# Altium PCB EE318.PcbDoc
Units mm, origin at the board's own origin, x right, y up, seen from the top; angles counter-clockwise.
Board outline 71.4 x 70 mm, 2 copper layers (Top Layer, Bottom Layer); 33 components, 36 nets, 108 pads, 17 vias.
Unrouted connection lines stored in the file: 1.
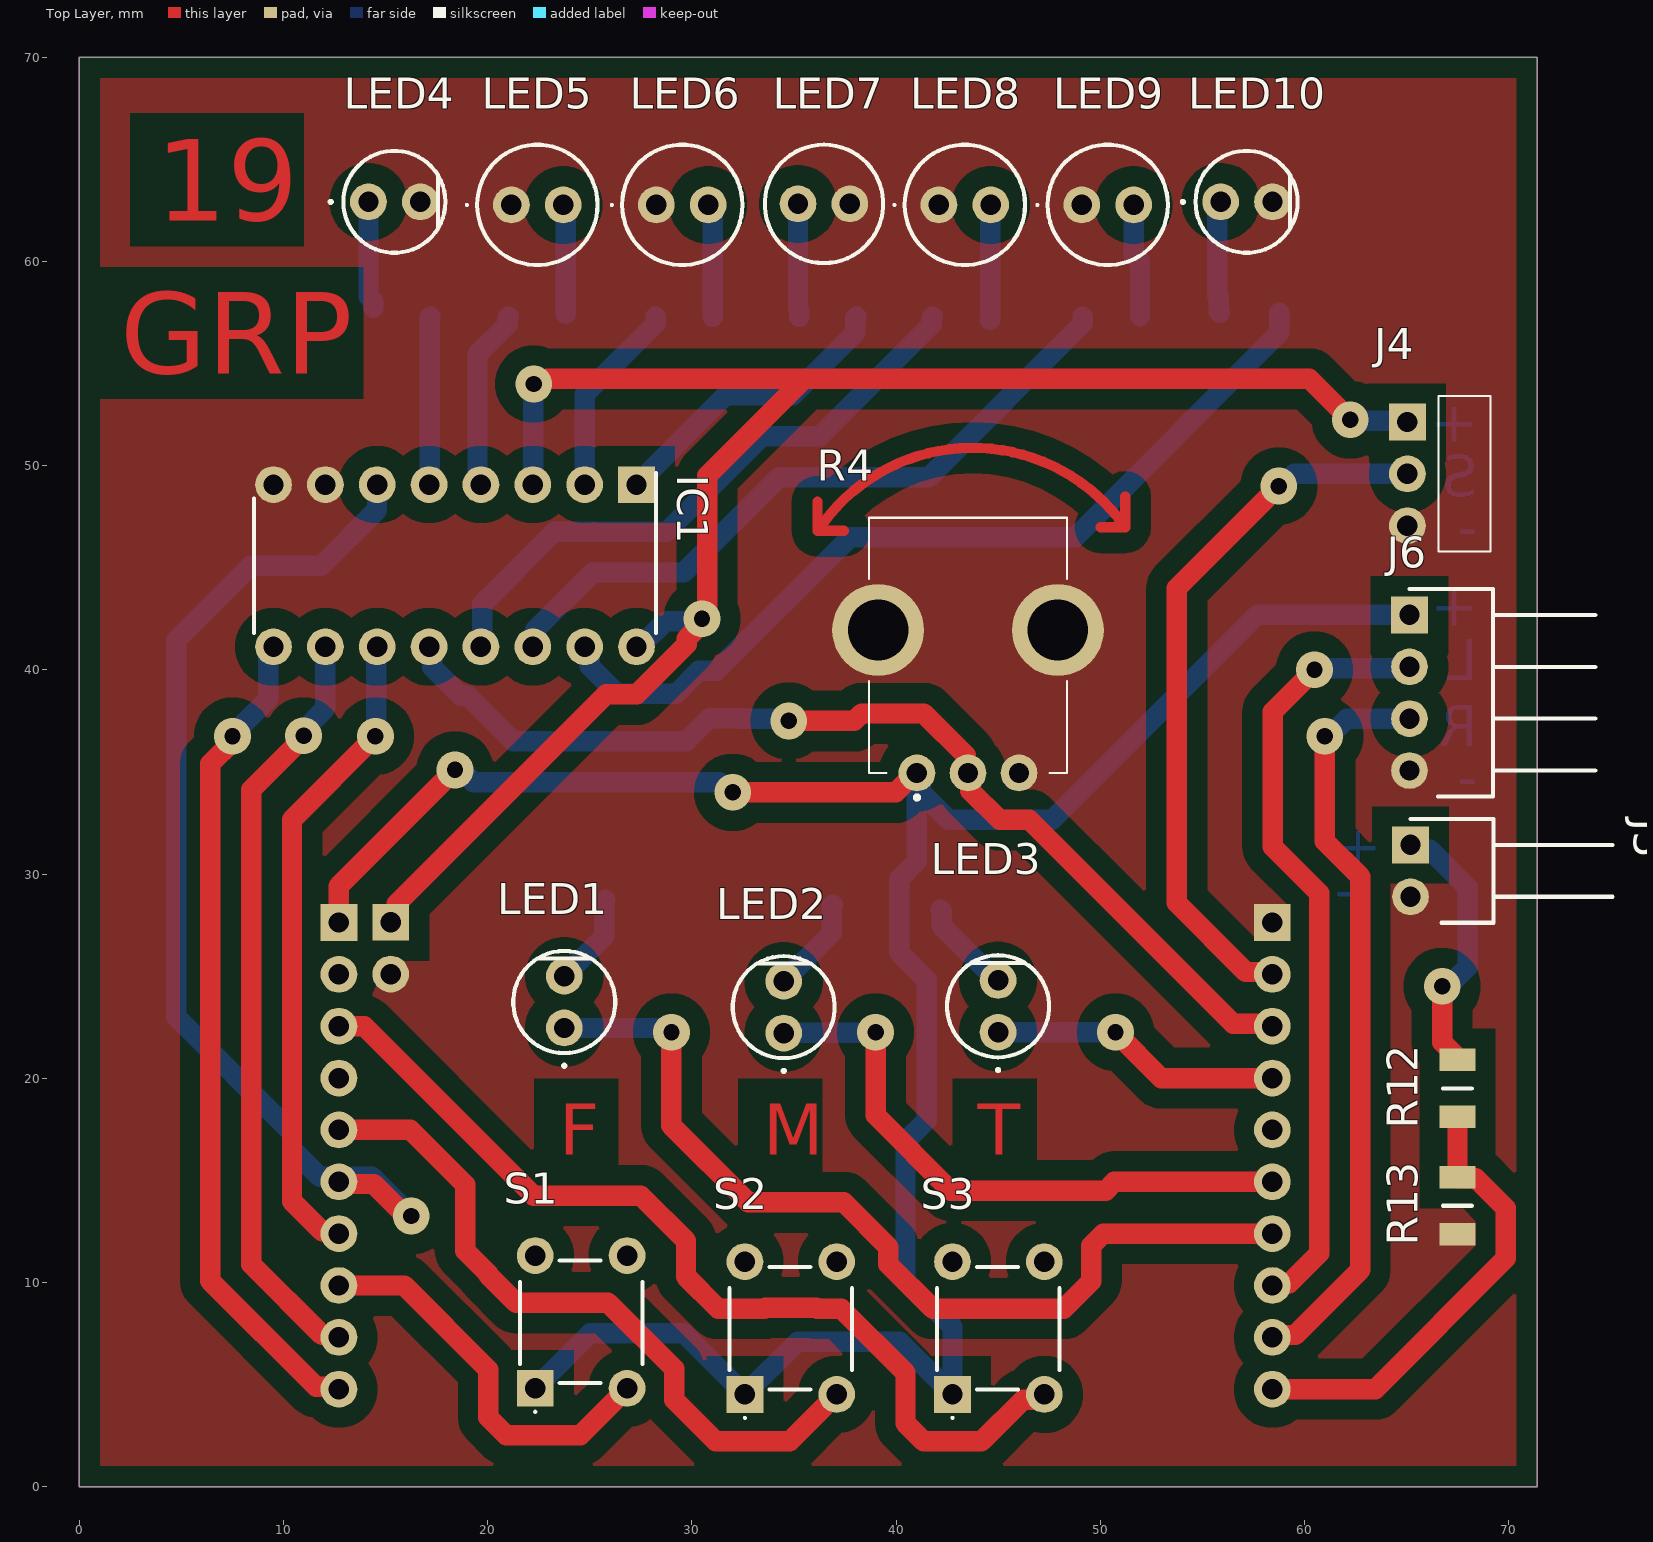
[diagram p0: Top Layer view]
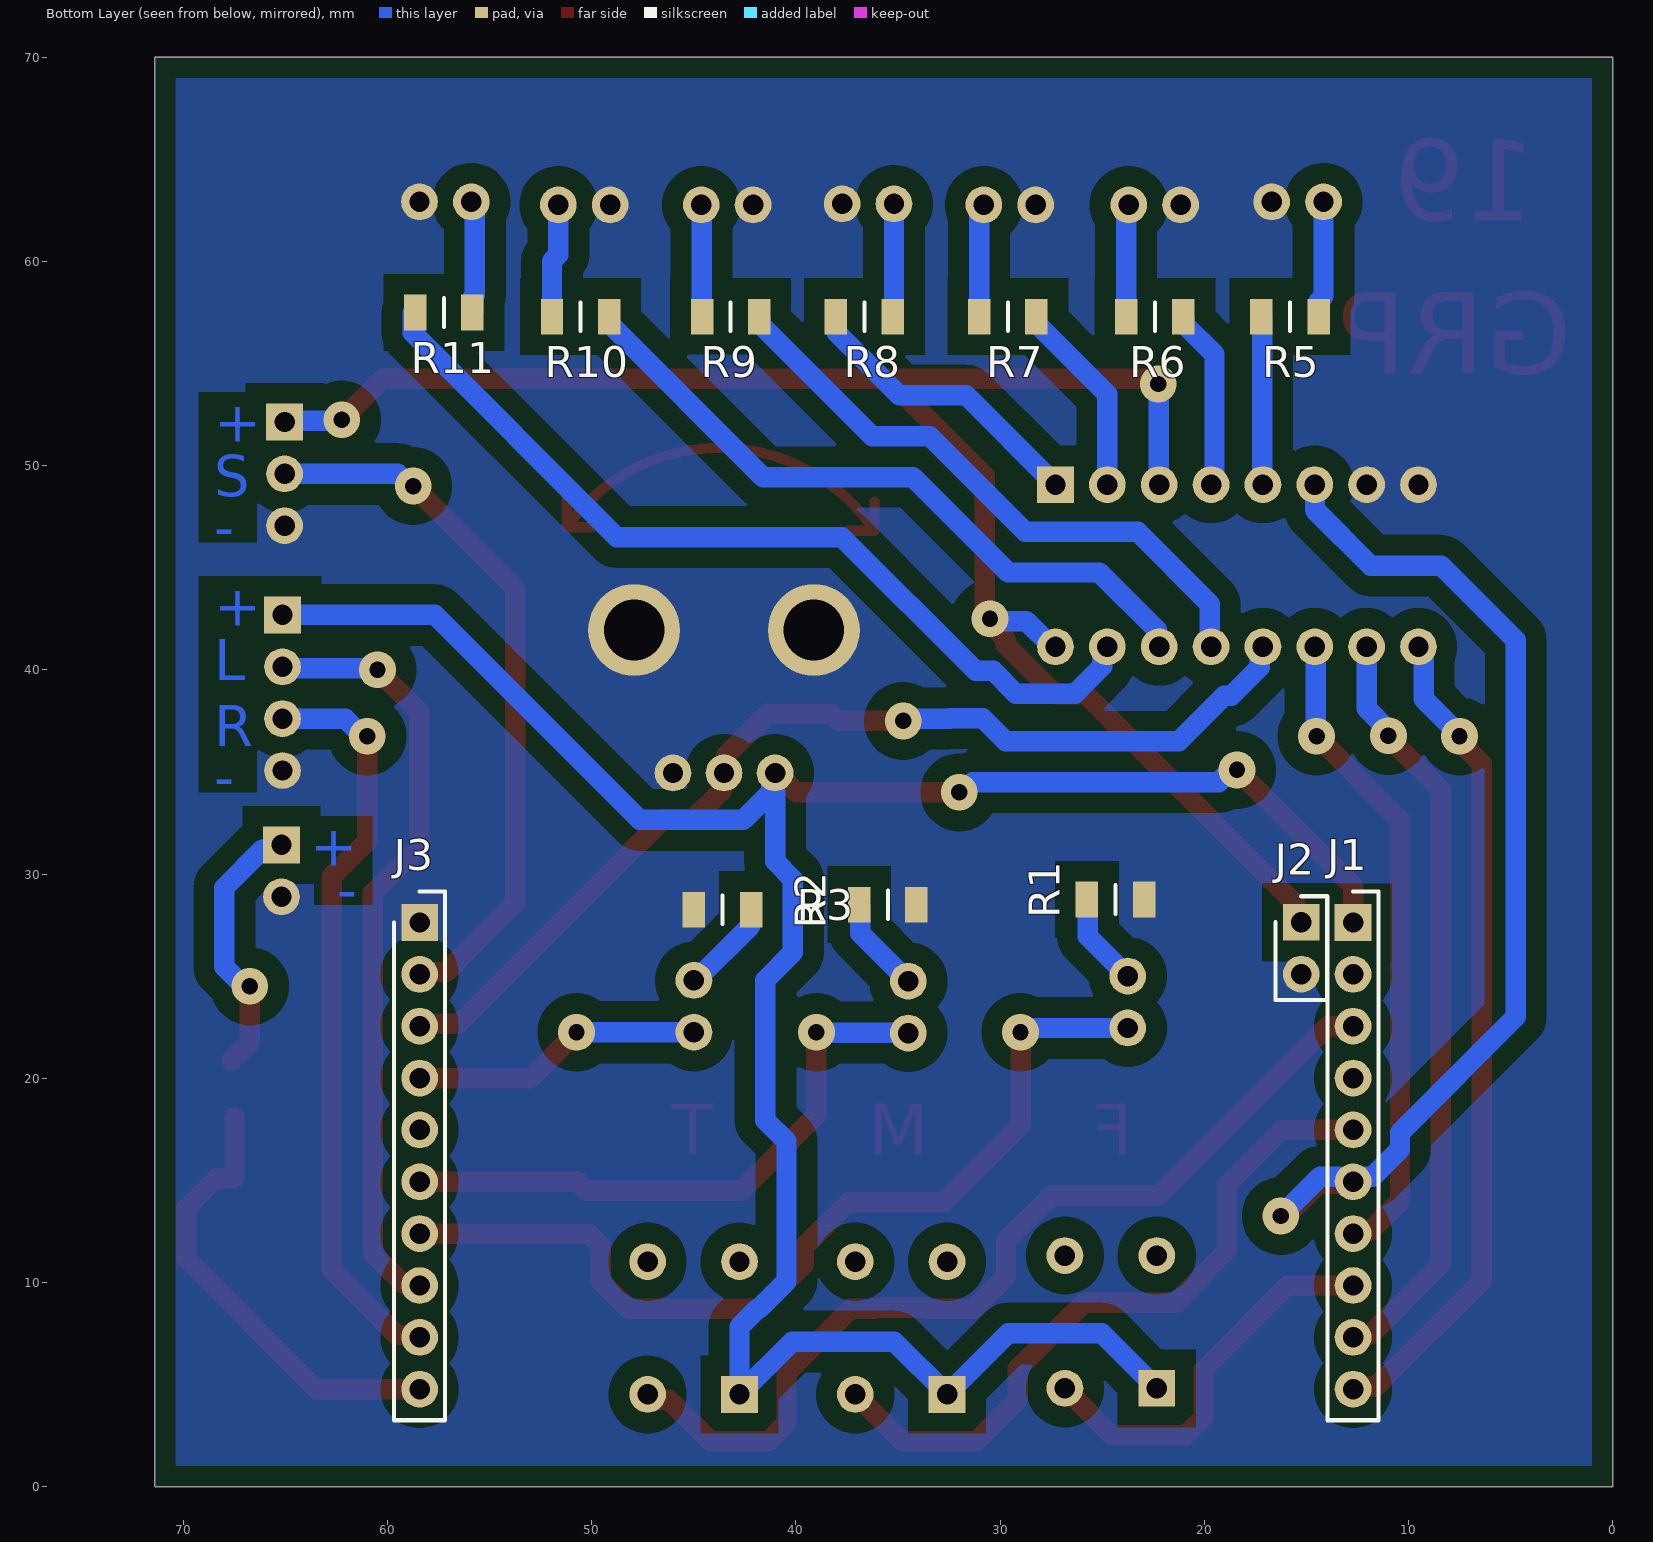
[diagram p1: Bottom Layer view, seen from below]
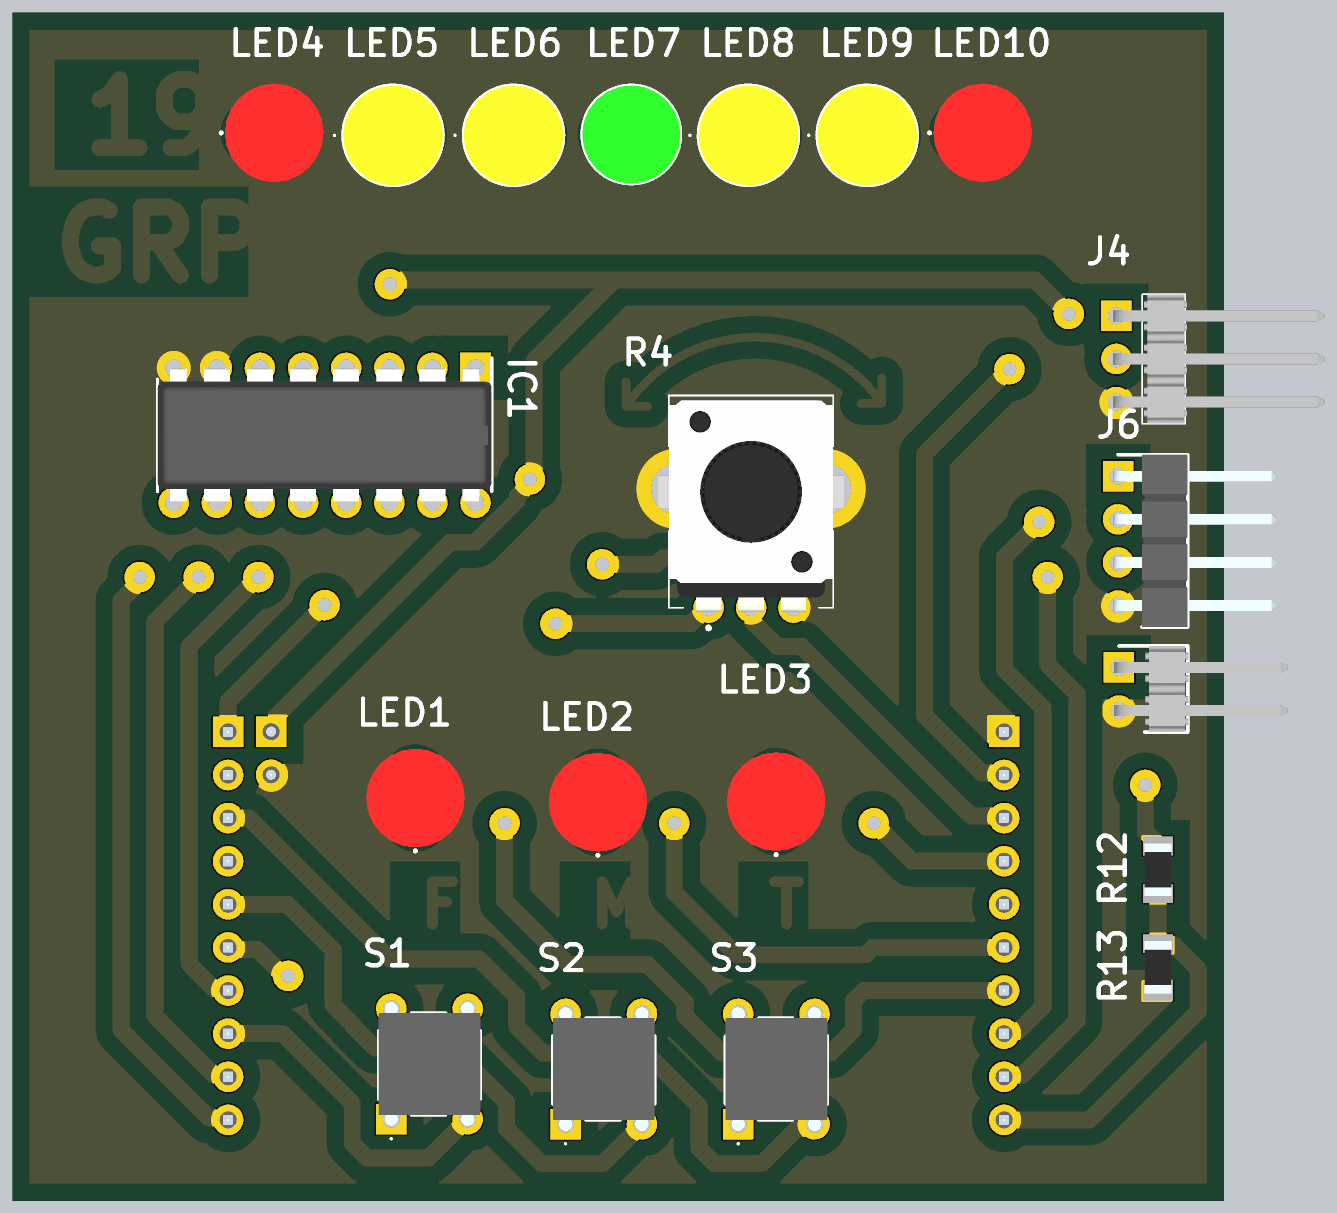
[diagram p2: 3D render of the assembled board from above, using the file's embedded part models]
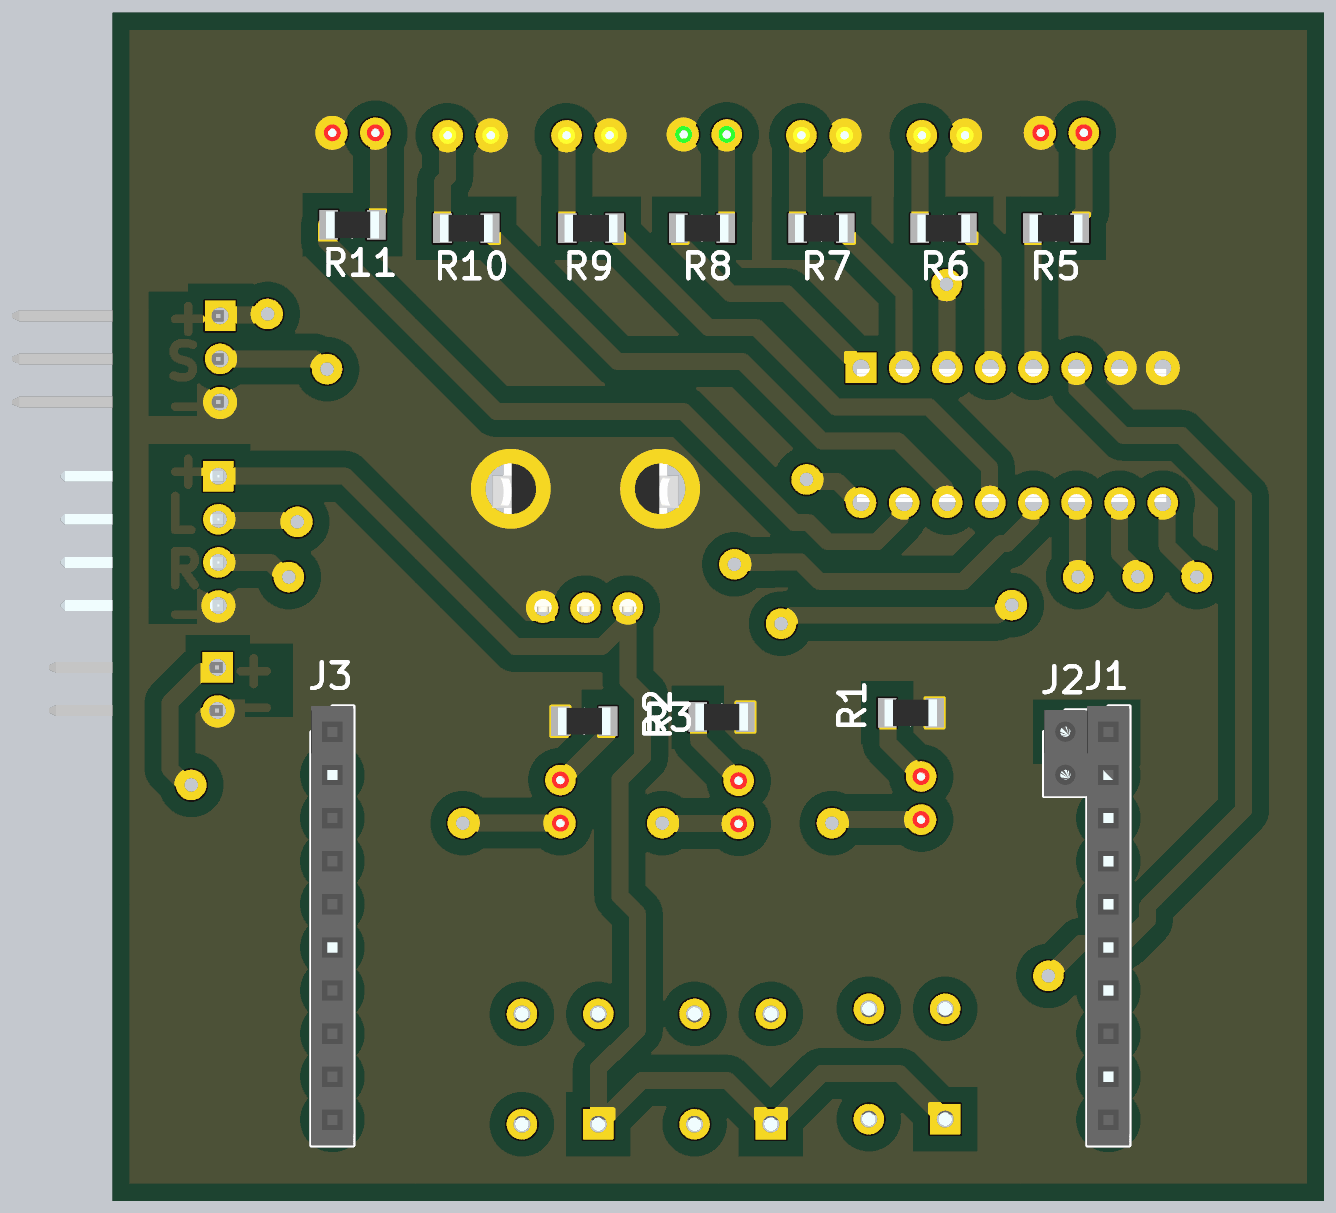
[diagram p3: 3D render of the assembled board from below, using the file's embedded part models]

## Layer stack, top to bottom
Top Solder: solder mask 0.0102, Solder Resist, Dk 3.5
Top Layer: signal copper 0.0356
Dielectric 1: dielectric 0.32, FR-4, Dk 4.8
Bottom Layer: signal copper 0.0356
Bottom Solder: solder mask 0.0102, Solder Resist, Dk 3.5

## Board outline
0,0 71.4,0 71.4,70 0,70

## Design rules (kind name [scope] priority, off if disabled: settings)
Clearance Clearance_1 [All] p1: gap=1 ignorepadtopadclearanceinfootprint=FALSE except(0: Arc-Hole Track-Hole SMDPad-Hole THPad-Hole Via-Hole Fill-Hole Poly-Hole Region-Hole Text-Hole; 0.254: Arc-Text Track-Text SMDPad-Text THPad-Text Via-Text Fill-Text Poly-Text Region-Text Text-Text; 0.8: THPad-THPad)
HoleSize [All] p1: absolutevalues=TRUE maxlimit=2.54 minlimit=0.8 maxpercent=80.000 minpercent=20.000
PlaneConnect [All] p1: planeconnectstyle=Direct reliefexpansion=0.508 reliefentries=4 reliefconductorwidth=0.254 reliefairgap=0.254
PolygonConnect [All] p1: connectstyle=Direct reliefconductorwidth=0.254 reliefentries=4 polygonreliefangle="90 Angle" airgapwidth=0.254
RoomDefinition EE318 [InComponentClass('EE318')] p1: confinementstyle=ConfineIn formatcopy=TRUE lockcomponents=FALSE outline -19.6,-25.4 31.2,-25.4 31.2,0 -19.6,0
RoutingVias [All] p1: holewidth=0.8 width=1.6 viastyle="Through Hole" minholewidth=0.8 minwidth=1.6 maxholewidth=0.8 maxwidth=2
SolderMaskExpansion [All] p1: expansion=0.102 istentingtop=FALSE
Width [All] p1: maxlimit=2 minlimit=1 preferedwidth=1 toplayer_minwidth=1 bottomlayer_prefwidth=1 minimp=50.000000 maximp=50.000000 favimp=50.000000
28 further rules are at their usual default settings.

## Components (designator, comment, footprint, x,y, rotation, side; value= is the part's Value field where it differs from the comment)
IC1 "CD4051BE" DIP794W53P254L1930H508Q16N 18.4,45.1 r270 top
J1 "61301011821" RHDR10W60P0X254_1X10_2590X250X850P 12.713,27.627 r270 bottom
J2 "801-87-002-10-001101" RHDR2W60P0X254_1X2_508X254X700P 15.25,27.639 r270 bottom
J3 "61301011821" RHDR10W60P0X254_1X10_2590X250X850P 58.433,27.627 r270 bottom
J4 "10129379-903003BLF" 10129379903003BLF 65.05,52.14 r270 top
J5 "10129379-902001BLF" HDRRA2W67P0X254_1X2_508X254X241P 65.2,31.425 r270 top
J6 "861400041LO1705LF" HDRRA4W63P0X254_1X4_1016X260X264P 65.15,42.69 r270 top
LED1 "RED" C503BRCNCW0Z0AA2 23.75,22.46 r90 top
LED2 "RED" C503BRCNCW0Z0AA2 34.5,22.21 r90 top
LED3 "RED" C503BRCNCW0Z0AA2 45,22.25 r90 top
LED4 "RED" C503BRCNCW0Z0AA2 14.16,62.925 r0 top
LED5 "YELLOW" 151051YS04000 21.16,62.775 r0 top
LED6 "YELLOW" 151051YS04000 28.26,62.775 r0 top
LED7 "GREEN" C503BGANCB0F0791 35.2,62.825 r0 top
LED8 "YELLOW" 151051YS04000 42.1,62.775 r0 top
LED9 "YELLOW" 151051YS04000 49.1,62.775 r0 top
LED10 "RED" C503BRCNCW0Z0AA2 55.9,62.925 r0 top
R1 "220R" RESC3116X65N 24.35,28.75 r0 bottom
R2 "220R" RESC3116X65N 35.5,28.5 r0 bottom
R3 "220R" RESC3116X65N 43.6,28.25 r180 bottom
R4 "PTV09A-4225F-B103" PTV09A4020FB103 43.525,40.55 r0 top
R5 "220R" RESC3116X65N 15.8,57.3 r0 bottom
R6 "220R" RESC3116X65N 22.425,57.3 r180 bottom
R7 "220R" RESC3116X65N 29.625,57.3 r180 bottom
R8 "220R" RESC3116X65N 36.65,57.3 r0 bottom
R9 "220R" RESC3116X65N 43.2,57.3 r180 bottom
R10 "220R" RESC3116X65N 50.55,57.3 r180 bottom
R11 "220R" RESC3116X65N 57.25,57.5 r0 bottom
R12 "1.8k" RESC3116X65N 67.5,19.5 r90 top
R13 "1.8k" RESC3116X65N 67.5,13.75 r90 top
S1 "TS02-66-55-BK-160-LCR-D" TS026655BK160LCRD 22.328,4.811 r90 top
S2 "TS02-66-55-BK-160-LCR-D" TS026655BK160LCRD 32.597,4.511 r90 top
S3 "TS02-66-55-BK-160-LCR-D" TS026655BK160LCRD 42.766,4.511 r90 top

## Footprints (in the part's own frame and the unit in brackets; to place one, negate y for a bottom-side part, rotate by r counter-clockwise, add the part's x,y. Pads: shape width x height; smd on the part's side, far side on the other; paste and mask are expansions set on the pad)
151051YS04000 [mm]
  round 1.8 hole 1: 1(0,0) 2(2.54,0)
  silkscreen extent -2.23,-2.95 4.22,2.95, body extent -1.68,-2.95 4.22,2.95, height 8.95
10129379903003BLF [mm]
  rect 1.8x1.8 hole 1: 1(0,0)
  round 1.8 hole 1: 2(2.54,0) 3(5.08,0)
  silkscreen extent -1.27,1.52 6.35,4.06, body extent -1.27,-0.21 6.35,12.25, height 2.35
C503BGANCB0F0791 [mm]
  round 1.8 hole 1: 1(0,0) 2(2.54,0)
  silkscreen extent -1.63,-2.9 4.17,2.9, body extent -1.63,-2.9 4.17,2.9, height 10.55
C503BRCNCW0Z0AA2 [mm]
  round 1.8 hole 1: 1(0,0) 2(2.54,0)
  silkscreen extent -1.9,-2.5 3.77,2.5, body extent -1.63,-2.9 4.17,2.9, height 10.3
DIP794W53P254L1930H508Q16N [mm]
  rect 1.8x1.8 hole 1: 1(-3.97,8.89)
  round 1.8 hole 1: 2(-3.97,6.35) 3(-3.97,3.81) 4(-3.97,1.27) 5(-3.97,-1.27) 6(-3.97,-3.81) 7(-3.97,-6.35) 8(-3.97,-8.89) 9(3.97,-8.89) 10(3.97,-6.35) 11(3.97,-3.81) 12(3.97,-1.27) 13(3.97,1.27) 14(3.97,3.81) 15(3.97,6.35) 16(3.97,8.89)
  silkscreen extent -4.53,-9.84 3.3,9.84, body extent -3.94,-9.84 3.94,9.84, height 5.27
HDRRA2W67P0X254_1X2_508X254X241P [mm]
  rect 1.8x1.8 hole 1: 1(0,0)
  round 1.8 hole 1: 2(2.54,0)
  silkscreen extent -1.27,0 3.81,9.9, body extent -1.27,-0.28 3.81,9.94, height 2.41
HDRRA4W63P0X254_1X4_1016X260X264P [mm]
  rect 1.8x1.8 hole 1: 1(0,0)
  round 1.8 hole 1: 2(2.54,0) 3(5.08,0) 4(7.62,0)
  silkscreen extent -1.27,0 8.89,9.1, body extent -1.27,-0.32 8.89,9.3, height 2.64
PTV09A4020FB103 [mm]
  round 1.8 hole 1: 1(-2.5,-5.6) 2(0,-5.6) 3(2.5,-5.6)
  round 4.5 hole 2.973: 3(-4.4,1.4) 5(4.4,1.4)
  silkscreen extent -4.85,-6.9 4.85,6.9, body extent -5.48,-5.85 5.48,6.61, height 25.08
RESC3116X65N [mm]
  rect 1.1x1.75 smd: 1(-1.4,0) 2(1.4,0)
  silkscreen extent 0,-0.7 0,0.7, body extent -1.55,-0.8 1.55,0.8, height 0.65
RHDR2W60P0X254_1X2_508X254X700P [mm]
  rect 1.8x1.8 hole 1: 1(0,0)
  round 1.8 hole 1: 2(2.54,0)
  silkscreen extent -1.27,-1.27 3.81,1.27, body extent -1.27,-1.27 3.81,1.27, height 7
RHDR10W60P0X254_1X10_2590X250X850P [mm]
  rect 1.8x1.8 hole 1: 1(0,0)
  round 1.8 hole 1: 2(2.54,0) 3(5.08,0) 4(7.62,0) 5(10.16,0) 6(12.7,0) 7(15.24,0) 8(17.78,0) 9(20.32,0) 10(22.86,0)
  silkscreen extent -1.52,-1.25 24.38,1.25, body extent -1.52,-1.25 24.38,1.25, height 8.5
TS026655BK160LCRD [mm]
  rect 1.8x1.8 hole 1: 1(0,0)
  round 1.8 hole 1: 2(6.5,0) 3(0,-4.5) 4(6.5,-4.5)
  silkscreen extent -1.2,-5.25 6.25,0.75, body extent -0.4,-5.25 6.9,0.75, height 5.8

## Part data
IC1: "Multiplexer", Manufacturer_Name="Texas Instruments", Mouser Part Number=595-CD4051BE, Arrow Part Number=CD4051BE, Arrow Price/Stock=https://www.arrow.com/en/products/cd4051be/texas-instruments?region=nac, Datasheet Link=http://www.ti.com/lit/ds/symlink/cd4051b.pdf, Height=5.08mm, Manufacturer_Part_Number=CD4051BE, Mouser Price/Stock=https://www.mouser.co.uk/ProductDetail/Texas-Instruments/CD4051BE?qs=q2XTDbzbm6DxulBsMcV7tA%3D%3D
J1 J3: "Connector", Manufacturer_Name="Wurth Elektronik", Mouser Part Number=710-61301011821, Datasheet Link=http://katalog.we-online.de/em/datasheet/6130xx11821.pdf, Height=8.5mm, Manufacturer_Part_Number=61301011821, Mouser Price/Stock=https://www.mouser.co.uk/ProductDetail/Wurth-Elektronik/61301011821?qs=W%252B2sBeLta1ZhlLR0YCzonQ%3D%3D
J2: "Connector", Manufacturer_Name=Preci-Dip, Mouser Part Number=437-8018700210001101, Datasheet Link=http://www.precidip.com/AppHost/9696,1/Scripts/Modules/Catalog/Default.aspx?c=7&i=310&p=107&pdf=1&dsku=801-PP-NNN-10-001101, Height=7mm, Manufacturer_Part_Number=801-87-002-10-001101, Mouser Price/Stock=https://www.mouser.com/Search/Refine.aspx?Keyword=437-8018700210001101
J4: "Connector", Manufacturer_Name="Amphenol Communications Solutions", Mouser Part Number=649-1012937990303BLF, Datasheet Link=https://cdn.amphenol-cs.com/media/wysiwyg/files/drawing/10129379.pdf, Height=2.41mm, Manufacturer_Part_Number=10129379-903003BLF, Mouser Price/Stock=https://www.mouser.co.uk/ProductDetail/Amphenol-FCI/10129379-903003BLF?qs=0lQeLiL1qya1UBwARe4kTQ%3D%3D
J5: "Connector", Manufacturer_Name="Amphenol Communications Solutions", Mouser Part Number=649-1012937990201BLF, Arrow Part Number=10129379-902001BLF, Arrow Price/Stock=https://www.arrow.com/en/products/10129379-902001blf/amphenol-fci?region=nac, Datasheet Link=https://cdn.amphenol-cs.com/media/wysiwyg/files/drawing/10129379.pdf, Height=2.41mm, Manufacturer_Part_Number=10129379-902001BLF, Mouser Price/Stock=https://www.mouser.co.uk/ProductDetail/Amphenol-FCI/10129379-902001BLF?qs=0lQeLiL1qyaP31CJBOzNsg%3D%3D
J6: "Connector", Manufacturer_Name="Amphenol Communications Solutions", Mouser Part Number=649-86140041LO1705LF, Datasheet Link=https://cdn.amphenol-cs.com/media/wysiwyg/files/drawing/c-8614-0136.pdf, Height=2.64mm, Manufacturer_Part_Number=861400041LO1705LF, Mouser Price/Stock=https://www.mouser.co.uk/ProductDetail/Amphenol-FCI/861400041LO1705LF?qs=7JiUwvV4mh6qwBpNV5AhhA%3D%3D
LED1 LED2 LED3 LED4 LED10: library part C503B-RCN-CW0Z0AA2, "LED", Manufacturer_Name=Wolfspeed, Mouser Part Number=941-C503BRCNCW0Z0AA2, Arrow Part Number=C503B-RCN-CW0Z0AA2, Arrow Price/Stock=https://www.arrow.com/en/products/c503b-rcn-cw0z0aa2/cree-led?region=nac, Datasheet Link=https://www.cree.com/led-components/media/documents/C503B-RAS-RAN-AAS-AAN-RBS-RBN-ABS-ABN-RCS-RCN-ACS-ACN-1079.pdf, Height=10.3mm, Manufacturer_Part_Number=C503B-RCN-CW0Z0AA2, Mouser Price/Stock=https://www.mouser.co.uk/ProductDetail/Cree-LED/C503B-RCN-CW0Z0AA2?qs=D3QG1iK7Fqi9NpEpLN2Agw%3D%3D
LED5 LED6 LED8 LED9: library part 151051YS04000, "LED", Manufacturer_Name="Wurth Elektronik", Mouser Part Number=710-151051YS04000, Datasheet Link=https://katalog.we-online.de/led/datasheet/151051YS04000.pdf, Height=8.95mm, Manufacturer_Part_Number=151051YS04000, Mouser Price/Stock=https://www.mouser.co.uk/ProductDetail/Wurth-Elektronik/151051YS04000?qs=LlUlMxKIyB0Q49NwiX6stg%3D%3D
LED7: library part C503B-GAN-CB0F0791, "LED", Manufacturer_Name=Wolfspeed, Mouser Part Number=941-C503BGANCB0F0791, Arrow Part Number=C503B-GAN-CB0F0791, Arrow Price/Stock=https://www.arrow.com/en/products/c503b-gan-cb0f0791/cree, Datasheet Link=https://www.cree.com/led-components/media/documents/1300-C503B-BAS-BAN-GAS-GAN.pdf, Height=10.55mm, Manufacturer_Part_Number=C503B-GAN-CB0F0791, Mouser Price/Stock=https://www.mouser.co.uk/ProductDetail/Cree-LED/C503B-GAN-CB0F0791?qs=UHyCXFkX5Ey%252ByHW9bNI8Ew%3D%3D
R1 R2 R3 R5 R6 R7 R8 R9 R10 R11 R12 R13: library part CRS1206QFX-1002ELF, "Resistor", Manufacturer_Name=Bourns, Mouser Part Number=652-CRS1206QFX-1002E, Datasheet Link=http://www.bourns.com/docs/Product-Datasheets/CRS-Q.pdf, Height=0.65mm, Manufacturer_Part_Number=CRS1206QFX-1002ELF, Mouser Price/Stock=https://www.mouser.co.uk/ProductDetail/Bourns/CRS1206QFX-1002ELF?qs=8Wlm6%252BaMh8QKdvkWTPthtg%3D%3D
R4: "Potentiometer", Manufacturer_Name=Bourns, RS Part Number=8274990P, Allied_Number=71279417, Datasheet Link=http://uk.rs-online.com/web/p/products/8274990P, Height=20mm, Manufacturer_Part_Number=PTV09A-4225F-B103, RS Price/Stock=http://uk.rs-online.com/web/p/products/8274990P
S1 S2 S3: "Switch", Manufacturer_Name="CUI Devices", Mouser Part Number=179-TS026655BK160LCR, Arrow Part Number=TS02-66-55-BK-160-LCR-D, Arrow Price/Stock=https://www.arrow.com/en/products/ts02-66-55-bk-160-lcr-d/cui-devices?region=nac, Datasheet Link=https://www.cuidevices.com/product/resource/ts02.pdf, Height=5.7mm, Manufacturer_Part_Number=TS02-66-55-BK-160-LCR-D, Mouser Price/Stock=https://www.mouser.co.uk/ProductDetail/CUI-Devices/TS02-66-55-BK-160-LCR-D?qs=A6eO%252BMLsxmRHvFZWtBPtJQ%3D%3D

## Via types
v1: diameter 1.8, hole 0.8, Top Layer to Bottom Layer, 17 vias

## Nets (pads, with @x,y where several pads share a name; then routed paths per layer and width w, separated by ;. In a path a pad name is that pad's centre, name@x,y a point inside that pad or via, vN(x,y) a via of type N, cw(c..) or ccw(c..) an arc to the next point about the centre after c; other vN are vias at no path point)
+3.3: J1.1 J6.1 R4.1 S1.1 S2.1 S3.1 | length 119.7
  Top Layer w1: J1.1 12.713,29.413 v1(18.4,35.1) ; v1(32,34) 39.993,34 40.943,34.95 R4.1
  Bottom Layer w1: v1(18.4,35.1) 18.562,35.1 18.862,34.8 18.986,34.8 19.286,34.5 31.338,34.5 31.838,34 v1(32,34) ; S1.1 25.018,7.5 29.608,7.5 S2.1 35.186,7.1 40.176,7.1 S3.1 42.766,7.829 41.884,8.711 41.813,8.711 40.466,10.058 40.466,16.915 41.5,17.949 41.5,24.805 40.15,26.155 40.15,29.746 41.025,30.621 41.025,33.997 ; R4.1 41.14,34.835 41.14,34.411 41.225,34.326 41.225,33.997 42.572,32.65 47.65,32.65 57.69,42.69 J6.1
+5: IC1.3 IC1.16 J2.1 J4.1 | length 88.5
  Top Layer w1: J2.1 15.55,27.939 15.55,28.553 25.797,38.8 27.3,38.8 29.75,41.25 29.75,41.536 30.499,42.285 v1(30.499,42.501) ; v1(22.25,54) 22.365,54.115 22.789,54.115 22.924,54.25 35.5,54.25 ; v1@30.75,42.25 30.75,49.5 35.5,54.25 ; v1(62.25,52.25) 60.25,54.25 35.5,54.25
  Bottom Layer w1: IC1.3 22.23,49.09 22.23,53.98 v1(22.25,54) ; IC1.16 27.452,41.13 28.709,42.387 30.384,42.387 v1(30.499,42.501) ; v1(62.25,52.25) 62.305,52.195 64.995,52.195 J4.1
GND: IC1.7 IC1.8 J2.2 J3.1 J4.3 J5.2 J6.4 LED4.2 LED5.1 LED6.1 LED7.2 LED8.1 LED9.1 LED10.2 R1.1 R2.1 R3.1 R4.3 R4.5 R13.1 | length 17.7
  Top Layer w0.5: 36.158,46.811 cw(c43.75,41.75) 51.225,46.982
LDR1: J3.8 J6.2 | length 38
  Top Layer w1: J3.8 58.548,9.962 59.261,9.962 60.733,11.434 60.733,29.048 58.45,31.332 58.45,37.95 v1(60.5,40)
  Bottom Layer w1: v1(60.5,40) 60.575,40.075 65.075,40.075 J6.2
LDR2: J3.9 J6.3 | length 37
  Top Layer w1: J3.9 58.548,7.422 59.549,7.422 62.733,10.606 62.733,29.877 61,31.61 v1(61,36.75)
  Bottom Layer w1: v1(61,36.75) 61.216,36.75 62.076,37.61 J6.3
LED_MODE_1: J3.7 LED1.1 | length 46.1
  Top Layer w1: v1(29,22.25) 29,17.684 32.768,13.916 37.445,13.916 39.629,11.732 39.629,10.895 41.813,8.711 48.218,8.711 49.566,10.058 49.566,11.801 50.152,12.387 J3.7
  Bottom Layer w1: LED1.1 28.366,22.46 28.461,22.365 28.885,22.365 v1(29,22.25)
LED_MODE_2: J3.6 LED2.1 | length 29.7
  Top Layer w1: v1(39,22.25) 39,18.184 42.688,14.496 50.264,14.496 50.695,14.927 J3.6
  Bottom Layer w1: LED2.1 34.52,22.23 38.98,22.23 v1(39,22.25)
LED_MODE_3: J3.4 LED3.1 | length 14.4
  Top Layer w1: v1(50.75,22.25) 52.993,20.007 J3.4
  Bottom Layer w1: LED3.1 v1(50.75,22.25)
MODE_BTN_1: J1.8 S1.3 | length 19.5
  Top Layer w1: J1.8 15.903,9.847 20.028,5.722 20.028,3.389 20.907,2.511 24.528,2.511 S1.3
MODE_BTN_2: J1.5 S2.3 | length 34.5
  Top Layer w1: J1.5 16.205,17.467 18.9,14.772 18.9,11.557 20.028,10.429 20.028,10.358 21.386,9 25.892,9 29.128,5.763 29.128,4.258 31.176,2.211 34.797,2.211 S2.3
MODE_BTN_3: J1.3 S3.3 | length 46.4
  Top Layer w1: J1.3 13.953,22.547 22.25,14.25 27.5,14.25 29.713,12.037 29.713,10.287 31.289,8.711 33.55,8.711 33.6,8.761 36.094,8.761 36.144,8.711 37.323,8.711 40.466,5.568 40.466,3.089 41.344,2.211 44.187,2.211 46.226,4.25 46.581,4.25 46.727,4.396 47.151,4.396 S3.3
MUX_A: IC1.11 J1.7 | length 31.8
  Top Layer w1: J1.7 12.599,12.502 11.886,12.502 10.413,13.974 10.413,32.663 v1(14.5,36.75)
  Bottom Layer w1: v1(14.5,36.75) 14.545,36.795 14.545,41.085 IC1.11
MUX_B: IC1.10 J1.9 | length 37.5
  Top Layer w1: v1(10.982,36.768) 10.982,36.697 8.413,34.128 8.413,10.894 11.886,7.422 12.599,7.422 J1.9
  Bottom Layer w1: v1(10.982,36.768) 10.982,37.038 12.05,38.106 IC1.10
MUX_C: IC1.9 J1.10 | length 40.8
  Top Layer w1: v1(7.5,36.75) 7.5,36.479 6.413,35.393 6.413,10.066 11.597,4.882 12.599,4.882 J1.10
  Bottom Layer w1: v1(7.5,36.75) 7.5,36.821 9.25,38.571 9.25,40.708 9.51,40.968 IC1.9
MUX_INH: IC1.6 J1.6 | length 52.6
  Top Layer w1: J1.6 12.823,14.817 14.413,14.817 15.979,13.25 v1(16.25,13.25)
  Bottom Layer w1: IC1.6 14.579,49.059 14.579,47.829 11.85,45.1 8.4,45.1 4.75,41.45 4.75,23 10.413,17.337 10.413,16.514 11.761,15.167 12.049,15.167 12.174,15.042 12.588,15.042 12.713,15.167 12.839,15.042 13.252,15.042 13.378,15.167 14.333,15.167 v1(16.25,13.25)
MUX_LED0: IC1.5 R5.2 | length 8.3
  Bottom Layer w1: IC1.5 17.165,49.105 17.165,57.265 R5.2
MUX_LED1: IC1.4 R6.2 | length 8.9
  Bottom Layer w1: IC1.4 19.67,49.232 19.5,49.402 19.5,55.45 20.975,56.925 20.975,57.25 R6.2
MUX_LED2: IC1.2 R7.2 | length 9.7
  Bottom Layer w1: IC1.2 24.75,53.5 28.225,56.975 R7.2
MUX_LED3: IC1.1 R8.2 | length 14.6
  Bottom Layer w1: IC1.1 31.661,53.441 34.938,53.441 38,56.504 38,57.25 R8.2
MUX_LED4: IC1.13 R9.2 | length 30.2
  Bottom Layer w1: IC1.13 19.727,41.187 19.727,43.227 23.27,46.77 25.869,46.77 28.77,46.77 33.441,51.441 36.266,51.441 41.75,56.925 41.75,57.25 R9.2
MUX_LED5: IC1.14 R10.2 | length 34.2
  Bottom Layer w1: IC1.14 22.325,41.245 22.325,41.957 25.137,44.77 29.598,44.77 34.27,49.441 41.616,49.441 49.15,56.975 R10.2
MUX_LED6: IC1.15 R11.2 | length 43.7
  Bottom Layer w1: IC1.15 24.865,41.015 24.865,40.591 24.99,40.466 24.99,40.177 26.337,38.83 29.226,38.83 30.346,39.95 31.2,39.95 37.75,46.5 48.771,46.5 58.775,56.504 R11.2@58.775,57.5
NetJ5_1: J5.1 R12.2 | length 13.1
  Top Layer w1: v1(66.75,24.5) 66.75,21.75 R12.2@67.65,20.85
  Bottom Layer w1: J5.1 65.44,31.185 66.153,31.185 68,29.338 68,25.45 v1@66.9,24.35
NetLED1_2: LED1.2 R1.2 | length 4.6
  Bottom Layer w1: LED1.2 25.7,26.95 25.7,28.7 R1.2
NetLED2_2: LED2.2 R2.2 | length 4.7
  Bottom Layer w1: LED2.2 36.85,27.1 36.85,28.45 R2.2
NetLED3_2: LED3.2 R3.2 | length 4.7
  Bottom Layer w1: R3.2 42.25,28.2 42.25,27.454 44.914,24.79 LED3.2
NetLED4_1: LED4.1 R5.1 | length 5.3
  Bottom Layer w1: LED4.1 14.16,58.29 14.4,58.05 R5.1@14.4,57.725
NetLED5_2: LED5.2 R6.1 | length 5.4
  Bottom Layer w1: LED5.2 23.7,62.64 23.825,62.515 R6.1@23.825,57.45
NetLED6_2: LED6.2 R7.1 | length 5.6
  Bottom Layer w1: LED6.2 30.8,62.64 31.025,62.415 R7.1
NetLED7_1: LED7.1 R8.1 | length 5.5
  Bottom Layer w1: LED7.1 35.2,57.675 35.25,57.625 R8.1
NetLED8_2: LED8.2 R9.1 | length 5.6
  Bottom Layer w1: R9.1@44.6,57.15 44.62,57.17 44.62,62.755 LED8.2
NetLED9_2: LED9.2 R10.1 | length 5.6
  Bottom Layer w1: LED9.2 51.64,60.325 51.95,60.015 R10.1@51.95,57.325
NetLED10_1: LED10.1 R11.1 | length 5.5
  Bottom Layer w1: R11.1 55.8,57.55 55.8,58.268 55.725,58.343 55.725,62.588 55.9,62.763 LED10.1
POT: J3.3 R4.2 | length 51.6
  Top Layer w1: v1(34.75,37.5) 37.959,37.5 38.32,37.861 41.367,37.861 43.41,35.817 43.41,35.065 43.64,34.835 43.64,34.083 45.072,32.65 46.522,32.65 56.51,22.662 58.319,22.662 J3.3
  Bottom Layer w1: 17.13,41.13 17.13,40.914 17.283,40.76 17.283,40.123 18.676,38.73 19.02,38.73 21.25,36.5 29.725,36.5 30.86,37.635 32.452,37.635 32.473,37.615 34.635,37.615 v1(34.75,37.5)
PWR_MEASURE: J3.10 R12.1 R13.2 | length 22.5
  Top Layer w1: J3.10 63.463,4.767 69.875,11.179 69.875,13.625 68.4,15.1 67.55,15.1 R13.2 R12.1
SERVO: J3.2 J4.2 | length 35.2
  Top Layer w1: J3.2 58.319,25.202 57.137,25.202 53.75,28.589 53.75,44 v1(58.75,49)
  Bottom Layer w1: v1(58.75,49) 58.912,49 59.512,49.6 J4.2
pads on no net: IC1.12 J1.2 J1.4 J3.5 S1.2 S1.4 S2.2 S2.4 S3.2 S3.4
copper on no net: | length 5.4
  Top Layer w0.5: 36.158,48.25 36.158,46.811 37.442,46.811 ; 50.018,46.982 51.225,46.982 51.225,48.475

## Polygon pours and split planes (outlines as drawn)
GND on Top Layer "GND_L01_P002" (solid, pour order 2): 0,0 71.4,0 71.4,70 0,70
GND on Bottom Layer "GND_L02_P003" (solid, pour order 3): 0,0 71.4,0 71.4,70 0,70

## Keep-outs
Keep-Out Layer:
  the board outline again, w0.01

## Other copper
Top Layer:
  text "19" at 3.75,62 h4
  text "GRP" at 2,54.5 h4
  text "F" at 23.5,16.25 h2.5
  text "M" at 33.5,16.25 h2.5
  text "T" at 44,16.25 h2.5
Bottom Layer:
  text "+" at 68.5,51.167 h2
  text "S" at 68.5,48.5 h2
  text "-" at 68.5,46 h2
  text "+" at 68.5,42.167 h2
  text "L" at 68.5,39.5 h2
  text "R" at 68.5,36.25 h2
  text "-" at 68.5,33.75 h2
  text "+" at 61.5,30.417 h2
  text "-" at 61.5,28.25 h2

## Dimensions
12.713,4.767 to 15.25,25.099 on Mechanical 13
12.713,4.767 to 58.433,4.767 on Mechanical 13